# Altium PCB EVB-A32S1-M_PCB.PcbDoc (part 2 of 3)
Units mm, origin at the board's own origin, x right, y up, seen from the top; angles counter-clockwise.
Board outline 134 x 65 mm, 4 copper layers (L1 (Signal), L2 (GND), L3 (PWR), L4 (Signal)), stack 1.614 mm thick; 111 components, 86 nets, 411 pads, 377 vias.
Unrouted connection lines stored in the file: 3.
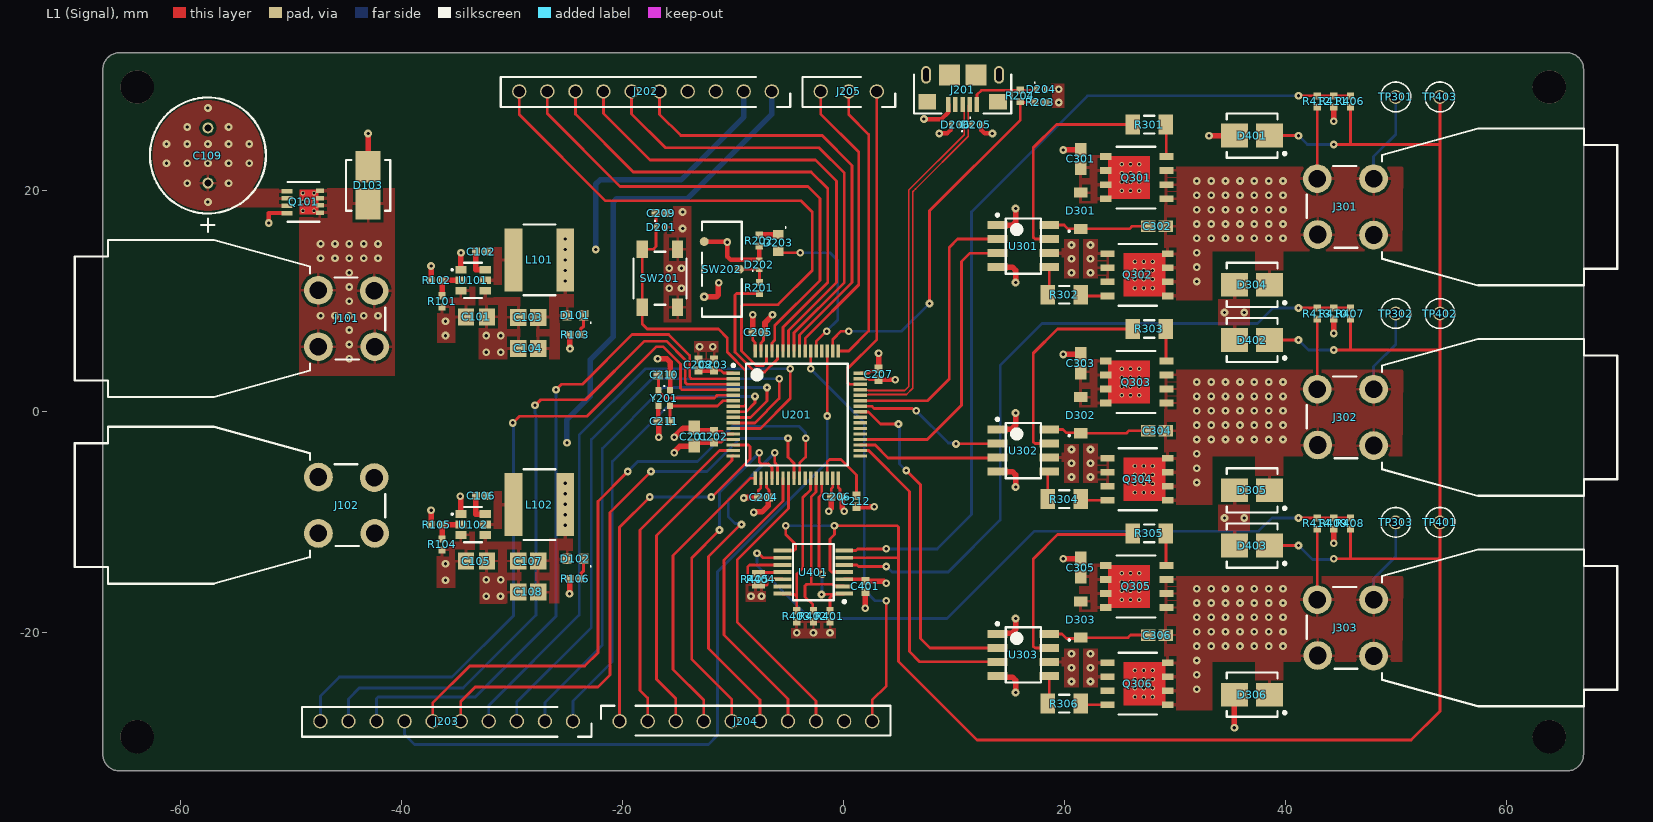
[diagram p0: L1 (Signal) view]

## Free pads (board coordinates)
  round 3 hole 3 unplated: MH1(-63.9,29.4) MH2(-63.9,-29.4) MH3(63.9,29.4) MH4(63.9,-29.4)

## Via types
v1: diameter 0.7, hole 0.3, L1 (Signal) to L4 (Signal), tented top, 299 vias
v2: diameter 0.4, hole 0.25, L1 (Signal) to L4 (Signal), tented top, 78 vias

## Nets (pads, with @x,y where several pads share a name; then routed paths per layer and width w, separated by ;. In a path a pad name is that pad's centre, name@x,y a point inside that pad or via, vN(x,y) a via of type N, cw(c..) or ccw(c..) an arc to the next point about the centre after c; other vN are vias at no path point)
3V3_BUCK_BST: C102.2 U101.6 | length 2.5
  L1 (Signal) w0.5: C102.2@-33.24,14.5 -33.24,12.85 U101.6@-32.4,12.85
3V3_BUCK_EN: R101.1 R102.2 U101.2 | length 3.1
  L1 (Signal) w0.5: R101.1@-36.3,10.5 R102.2@-36.3,11.9 U101.2@-34.6,11.9
3V3_BUCK_SW: C102.1 L101.1 U101.5
3V3_LED_K: D101.1 R103.2 | length 1.9
  L1 (Signal) w0.3: R103.2@-23.75,7 -23.75,7.5 -23.5,7.75 D101.1@-23.5,8.75
4IN+: R404.2 U401.11 | length 2
  L1 (Signal) w0.25: R404.2@-7.4,-14.65 -7.3,-14.55 -5.55,-14.55 U401.11@-5.5,-14.5
4IN-: R405.2 U401.10 | length 3.8
  L1 (Signal) w0.25: -8.65,-14.65 -8.65,-14.035 -8.465,-13.85 U401.10@-5.5,-13.85
5V_BUCK_BST: C106.2 U102.6 | length 2.5
  L1 (Signal) w0.5: C106.2@-33.24,-7.6 -33.24,-9.25 U102.6@-32.4,-9.25
5V_BUCK_EN: R104.1 R105.2 U102.2 | length 3
  L1 (Signal) w0.5: R104.1@-36.3,-11.5 R105.2@-36.3,-10.2 U102.2@-34.6,-10.2
5V_BUCK_SW: C106.1 L102.1 U102.5
5V_LED_K: D102.1 R106.2 | length 1.9
  L1 (Signal) w0.3: R106.2@-23.75,-15.1 -23.7,-15.05 -23.7,-14.6 -23.5,-14.4 D102.1@-23.5,-13.3
+3V3: C103.2 C104.2 C201.2 C202.2 C203.2 C204.2 C205.2 C206.2 C207.2 C208.2 D101.2 J202.2 L101.2 SW202.3 U101.1 U201.1 U201.13 U201.19 U201.32 U201.48 U201.64 | length 51.1
  L1 (Signal) w0.25: C202.2@-11.7,-2.74 -11.04,-2.74 -10.8,-2.5 U201.13@-9.95,-2.5 U201.13@-9.955,-2.505 ; C203.2@-11.7,3.76 -11.06,3.76 -10.825,3.525 -9.975,3.525 U201.1@-9.95,3.5 ; C205.2@-8.19,7.2 -8.19,6.495 -7.975,6.28 -7.975,5.525 U201.64@-7.95,5.5 ; U201.19@-6.95,-6 -6.95,-6.85 -6.71,-7.09 C204.2@-6.71,-7.75 ; U201.32@-0.45,-6 -0.45,-6.85 -0.3,-7 C206.2@-0.3,-7.53 ; U201.48@1.55,3.5 1.575,3.525 2.325,3.525 2.5,3.7 3.01,3.7 C207.2@3.2,3.89
  L1 (Signal) w0.5: U101.1@-34.6,12.85 v1(-34.6,14.4) ; v1(-15.3,-3.7) -15.262,-3.662 -15.262,-3.587 -14.775,-3.1 -13.55,-3.1 C201.2@-13.5,-3.05 -13.5,-3.015 -13.225,-2.74 C202.2@-11.7,-2.74 ; C208.2@-13.1,3.76 C203.2@-11.7,3.76 ; v1(-12.588,10.412) -11.488,10.412 -11.3,10.6 -11.3,11.65 v1(-11.262,11.688) ; v1(-8.2,8.8) -8.19,8.8 C205.2@-8.19,7.2 ; v1(-8.1,-9.1) -8.062,-9.062 -7.362,-9.062 -6.78,-8.48 -6.78,-7.82 C204.2@-6.71,-7.75 ; C206.2@-0.11,-7.7 -0.11,-8.736 0.1,-8.946 v1(0.1,-9) ; C207.2@3.2,3.89 v1(3.2,5.3)
  L4 (Signal) w0.5: v1(-22.4,14.7) -22.4,20.607 -22.007,21 -14.7,21 -9,26.7 J202.2@-9,29
  other v1: -25.15,11.85 -25.15,12.8 -25.15,13.75 -25.15,14.7 -25.15,15.65